# EAGLE board Panelizado_frentes_TOP (EAGLE 9.6.2)
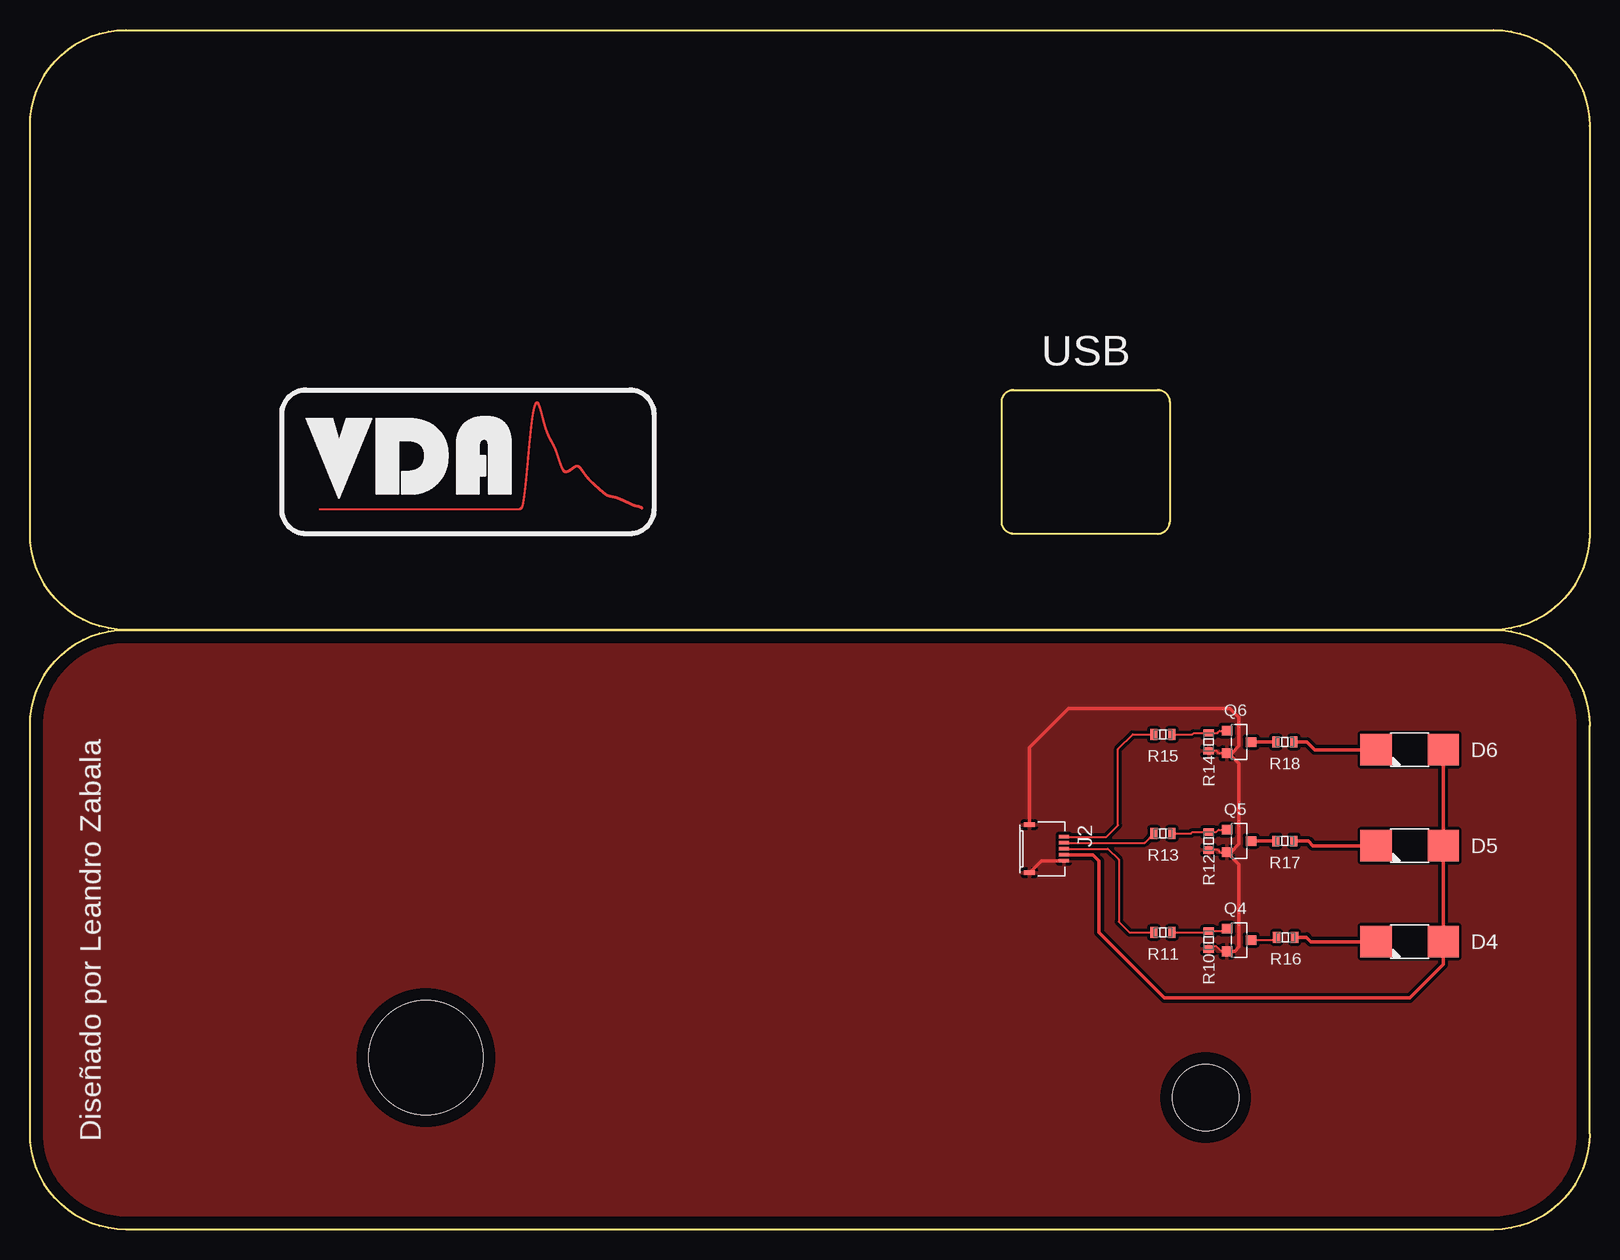
[diagram p0: board, top side]
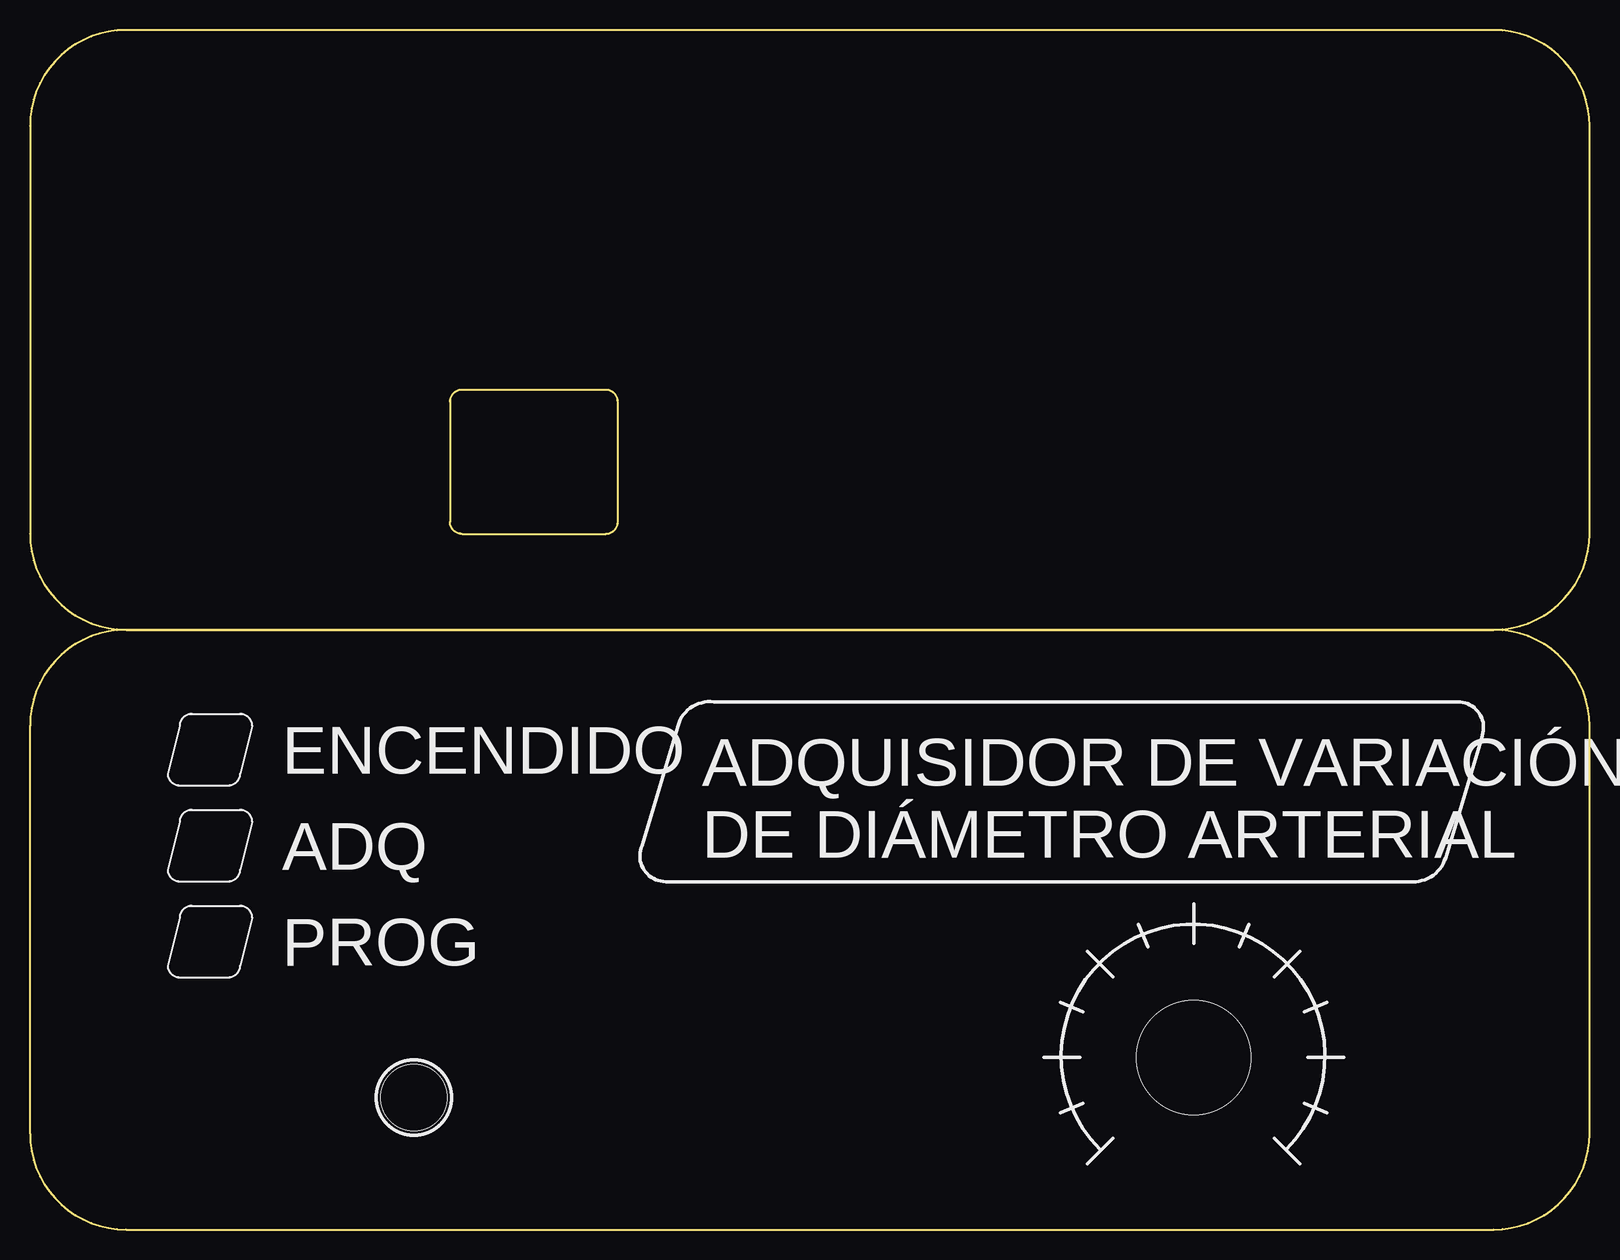
[diagram p1: board, bottom side, seen from below]

Size 130 x 100 mm. Coordinates in mm from the lower left corner, seen from the top.
Outline: 122,50 arc-90 130,42 130,8 arc-90 122,0 8,0 arc-90 0,8 0,42 arc-90 8,50
Outline: 8,50 122,50
Outline: 8,50 arc-90 0,58 0,92 arc-90 8,100 122,100 arc-90 130,92 130,58 arc-90 122,50
Outline: 122,50 8,50
Outline: 82,70 94,70 arc-90 95,69 95,59 arc-90 94,58 82,58 arc-90 81,59 81,69 arc-90 82,70
Copper layers (1*16): Top 0.035mm / dielectric 1.5mm / Bottom 0.035mm
Design rules "default": minimum track width 6mil, minimum drill 0.35mm, track to track 6mil, track to pad 6mil, pad to pad 6mil, via to via 6mil, smd to smd 6mil, copper to edge 40mil, drill to drill 6mil, minimum pad ring 10mil, minimum via ring 8mil, stop-mask expansion 4mil, vias tented up to drill 0mil, thermal gap 10mil
Holes 9.5 mm at 33,14.34
Holes 5.5 mm at 98,11

## Footprints (pad centres in the part's own frame; a part is rotated, then mirrored left to right if it is on the bottom)
VLRK31 = smd 2.6 x 2.6: A -2.8,0; K 2.8,0
F0504-H-05-10G-R = smd 0.3 x 0.85: P$1 -1,1.905; P$2 -0.5,1.905; P$3 0,1.905; P$4 0.5,1.905; P$5 1,1.905 | smd 0.4 x 0.95: P$7 -2,-0.97; P$8 2,-0.97
SOT-23 = smd 0.8 x 0.9: 1 -0.94,-1.003; 2 0.94,-1.003; 3 0,1.003
R_0603 = smd 0.61 x 0.889: 1 -0.749,0; 2 0.749,0

## Placement (x,y rotation side)
D4  LED-REVERSE_MOUNT  [VLRK31]  115,24 180 top
D5  LED-REVERSE_MOUNT  [VLRK31]  115,32 180 top
D6  LED-REVERSE_MOUNT  [VLRK31]  115,40 180 top
J2  F0504-H-05-10G-R  [F0504-H-05-10G-R]  84.28,31.75 270 top
Q4  BSS138  [SOT-23]  100.79,24.13 270 top
Q5  BSS138  [SOT-23]  100.79,32.38 270 top
Q6  BSS138  [SOT-23]  100.79,40.64 270 top
R10  100K  [R_0603]  98.25,24.13 90 top
R11  100R  [R_0603]  94.44,24.77 180 top
R12  100K  [R_0603]  98.25,32.38 90 top
R13  100R  [R_0603]  94.44,33.02 180 top
R14  100K  [R_0603]  98.25,40.64 90 top
R15  100R  [R_0603]  94.44,41.27 180 top
R16  100R  [R_0603]  104.66,24.36 180 top
R17  100R  [R_0603]  104.6,32.38 180 top
R18  100R  [R_0603]  104.6,40.64 180 top
U$1  LOGO_VDA-3CM  [LOGO_VDA-3CM]  23,60 0 top

## Library data of the parts
D4-D6 = property_LED
J2 = property-connectors
Q4-Q6 R10-R18 = Property-standar
U$1 = Frames

## Nets
+3V3: D4.A D5.A D6.A J2.P$4
GND: J2.P$5 J2.P$7 J2.P$8 Q4.2 Q5.2 Q6.2 R10.1 R12.1 R14.1
N$13: Q4.1 R10.2 R11.1
N$14: Q5.1 R12.2 R13.1
N$15: Q6.1 R14.2 R15.1
N$16: J2.P$3 R11.2
N$17: J2.P$2 R13.2
N$18: J2.P$1 R15.2
N$19: D4.K R16.1
N$20: Q4.3 R16.2
N$21: D5.K R17.1
N$22: Q5.3 R17.2
N$23: D6.K R18.1
N$24: Q6.3 R18.2

## Tracks (layer width: path | path; a pad name or v marks a point on that pad's centre or on a via)
+3V3
  Top 0.305: J2.P$4 88.59,31.25 89.11,30.73 89.11,24.77 94.57,19.3 115.01,19.3 117.8,22.09 D4.A D5.A D6.A
GND
  Top 0.152: Q6.2 99.12,39.7 98.93,39.89 R14.1 | R12.1 99.01,31.64 99.2,31.45 Q5.2 | Q4.2 99.31,23.19 98.89,23.61 98.38,23.61 98.25,23.48 R10.1
  Top 0.305: J2.P$5 84.31,30.75 J2.P$8 | Q4.2 100.42,23.19 100.79,23.56 100.79,30.44 Q5.2 100.09,31.45 100.79,32.14 100.79,38.86 99.95,39.7 Q6.2 100.17,39.7 100.79,40.32 100.79,42.67 100.03,43.43 86.57,43.43 83.31,40.18 J2.P$7
  pour Top: 84.92,35.56 81.74,35.56 81.74,27.94 84.92,27.94
  pour Top (isolate 0.254): 130.63,50 130.63,-0.64 -0.81,-0.64 -0.81,50
N$13
  Top 0.152: R11.1 98.14,24.77 R10.2 99.6,24.88 Q4.1
N$14
  Top 0.152: R13.1 96.79,33.02 96.91,33.13 R12.2 98.89,33.13 99.08,33.33 Q5.1
N$15
  Top 0.152: R15.1 96.89,41.27 97,41.39 R14.2 98.98,41.39 99.17,41.58 Q6.1
N$16
  Top 0.152: J2.P$3 89.84,31.75 90.76,30.83 90.76,25.65 91.65,24.77 R11.2
N$17
  Top 0.152: J2.P$2 92.92,32.25 R13.2
N$18
  Top 0.152: J2.P$1 89.75,32.75 90.69,33.7 90.69,40.05 91.92,41.27 R15.2
N$19
  Top 0.305: D4.K 106.77,24 106.41,24.36 R16.1
N$20
  Top 0.152: Q4.3 103.68,24.13 R16.2
N$21
  Top 0.305: R17.1 106.54,32.38 106.93,32 D5.K
N$22
  Top 0.305: Q5.3 R17.2
N$23
  Top 0.305: D6.K 107.09,40 106.45,40.64 R18.1
N$24
  Top 0.305: Q6.3 R18.2

## Text on the board
tPlace: USB | Diseñado por Leandro Zabala
bPlace: ENCENDIDO | ADQUISIDOR DE VARIACIÓN / DE DIÁMETRO ARTERIAL | ADQ | PROG